# Altium PCB RF-UNIT.PcbDoc (part 2 of 4)
Units mm, origin at the board's own origin, x right, y up, seen from the top; angles counter-clockwise.
Board outline 187 x 77 mm, 2 copper layers (Top Layer, Top, Bottom Layer, Bottom); 271 components, 171 nets, 804 pads, 2169 vias.
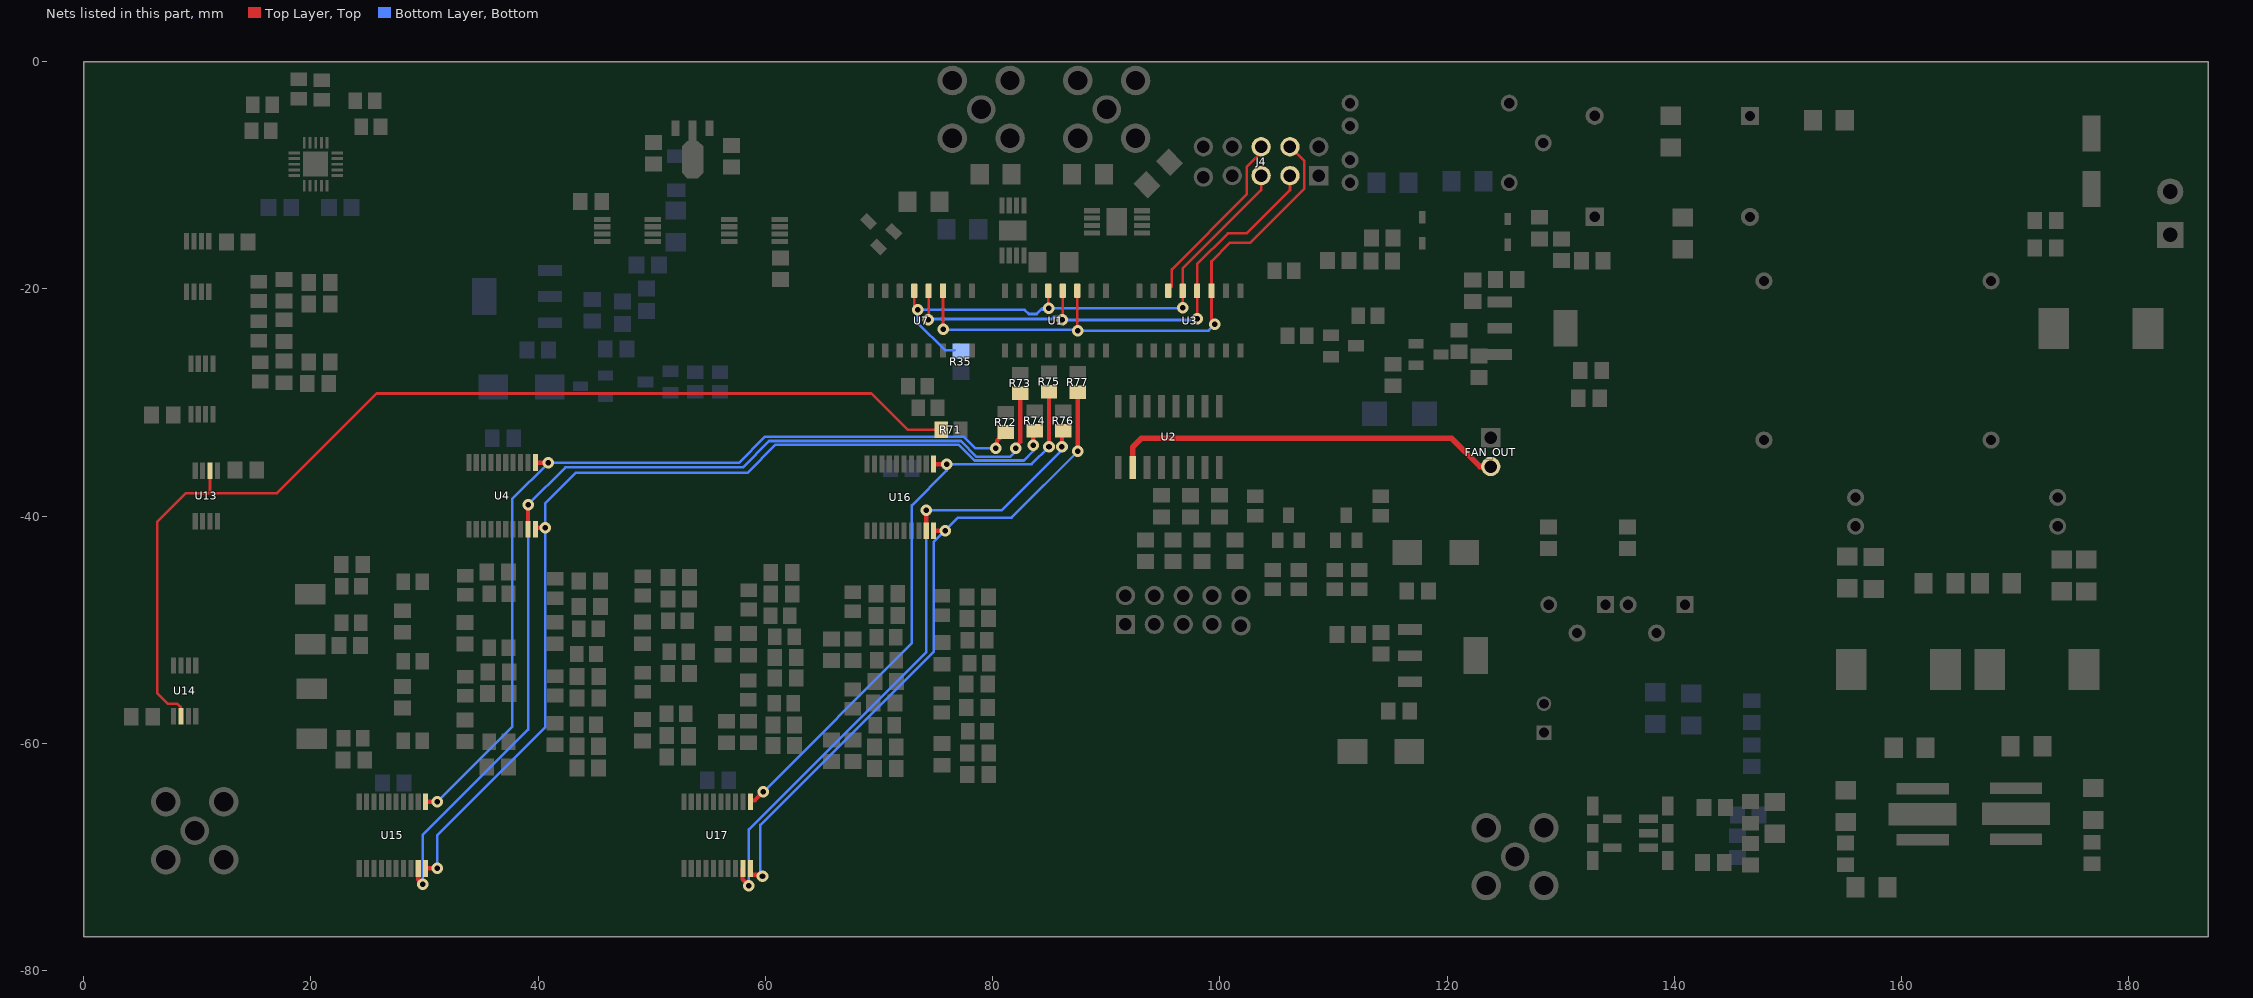
[diagram p2: the nets of this part, all layers, seen from the top]

## Via types
v1: diameter 0.5, hole 0.3, Top Layer, Top to Bottom Layer, Bottom, tented both sides, 1697 vias
v2: diameter 0.5, hole 0.3, Top Layer, Top to Bottom Layer, Bottom, 318 vias
v3: diameter 1.016, hole 0.486, Top Layer, Top to Bottom Layer, Bottom, tented both sides, 136 vias
v4: diameter 0.8, hole 0.486, Top Layer, Top to Bottom Layer, Bottom, tented both sides, 12 vias
v5: diameter 4, hole 3, Top Layer, Top to Bottom Layer, Bottom, 4 vias
v6: diameter 3.2, hole 3, Top Layer, Top to Bottom Layer, Bottom, 2 vias

## Nets (pads, with @x,y where several pads share a name; then routed paths per layer and width w, separated by ;. In a path a pad name is that pad's centre, name@x,y a point inside that pad or via, vN(x,y) a via of type N, cw(c..) or ccw(c..) an arc to the next point about the centre after c; other vN are vias at no path point) (continued)
BPF_1_A0: R74.1 U4.20 U15.20 | length 85.9
  Top Layer, Top w0.381: U15.20@30.103,-71.01 30.12,-70.993 v3(31.115,-70.993) ; U4.20@39.755,-41.165 39.755,-41.056 39.79,-41.021 v3(40.64,-41.021) ; v3(83.566,-33.782) 83.566,-32.6 R74.1@83.693,-32.473
  Bottom Layer, Bottom w0.23: v3(31.115,-70.993) 31.115,-68.102 40.64,-58.577 v3(40.64,-41.021) 40.64,-38.862 43.307,-36.195 58.42,-36.195 60.903,-33.712 77.019,-33.712 78.412,-35.105 82.751,-35.105 83.566,-34.29 v3(83.566,-33.782)
BPF_1_A1: R73.1 U4.19 U15.19 | length 92.3
  Top Layer, Top w0.381: U15.19@29.453,-71.01 29.459,-71.016 29.459,-72.004 v3(29.845,-72.39) ; U4.19@39.116,-41.154 v3(39.116,-38.989) ; v3(82.042,-34.036) 82.042,-33.864 82.423,-33.483 R73.1@82.423,-29.171
  Bottom Layer, Bottom w0.23: v3(29.845,-72.39) 29.845,-68.072 39.116,-58.801 v3(39.116,-38.989) 42.405,-35.7 58.026,-35.7 60.333,-33.393 77.208,-33.393 78.601,-34.786 81.546,-34.786 82.042,-34.29 v3(82.042,-34.036)
BPF_1_EN: R72.1 U4.1 U15.1 | length 78.7
  Top Layer, Top w0.381: U15.1@30.103,-65.134 30.12,-65.151 v3(31.115,-65.151) ; U4.1@39.755,-35.289 39.772,-35.306 v3(40.894,-35.306) ; v3(80.264,-34.036) 80.386,-33.914 80.386,-33.367 80.619,-33.135 80.619,-33.01 81.028,-32.6 R72.1@81.153,-32.6
  Bottom Layer, Bottom w0.23: v3(31.115,-65.151) 37.719,-58.547 37.719,-38.481 v3(40.894,-35.306) 57.658,-35.306 59.944,-33.02 77.47,-33.02 78.486,-34.036 v3(80.264,-34.036)
BPF_2_A0: R77.1 U16.20 U17.20 | length 59.7
  Top Layer, Top w0.381: U17.20@58.678,-71.01 58.678,-71.523 58.713,-71.557 59.433,-71.557 59.576,-71.7 v3(59.748,-71.7) ; U16.20@74.807,-41.292 74.824,-41.275 v3(75.819,-41.275) ; v3(87.503,-34.29) R77.1@87.503,-29.083
  Bottom Layer, Bottom w0.23: v3(59.748,-71.7) 59.563,-71.515 59.563,-67.183 74.803,-51.943 74.803,-42.291 v3(75.819,-41.275) 76.962,-40.132 81.661,-40.132 v3(87.503,-34.29)
BPF_2_A1: R76.1 U16.19 U17.19 | length 58.9
  Top Layer, Top w0.381: U17.19@58.028,-71.01 57.993,-71.045 57.993,-71.963 v3(58.547,-72.517) ; U16.19@74.157,-41.292 74.163,-41.286 74.163,-39.502 v3(74.168,-39.497) ; v3(86.106,-33.909) 86.106,-32.6 R76.1@86.233,-32.473
  Bottom Layer, Bottom w0.23: v3(58.547,-72.517) 58.547,-67.564 74.168,-51.943 v3(74.168,-39.497) 80.772,-39.497 86.106,-34.163 v3(86.106,-33.909)
BPF_2_EN: R75.1 U16.1 U17.1 | length 52.7
  Top Layer, Top w0.381: U17.1@58.678,-65.134 58.678,-65.06 58.713,-65.025 59.054,-65.025 v3(59.817,-64.262) ; U16.1@74.807,-35.416 74.824,-35.433 v3(75.946,-35.433) ; v3(84.963,-33.909) R75.1@84.963,-29.044
  Bottom Layer, Bottom w0.23: v3(59.817,-64.262) 72.898,-51.181 72.898,-39.053 75.946,-36.005 v3(75.946,-35.433) 83.439,-35.433 v3(84.963,-33.909)
BPF_ON: R71.1 U13.2 U14.2 | length 95.4
  Top Layer, Top w0.23: U14.2@8.565,-57.597 8.53,-57.562 8.53,-56.79 8.255,-56.515 7.408,-56.515 6.477,-55.584 6.477,-40.513 9.017,-37.973 11.176,-37.973 ; U13.2@11.12,-36.002 11.12,-37.917 11.176,-37.973 ; R71.1@75.477,-32.385 72.517,-32.385 69.342,-29.21 25.781,-29.21 17.018,-37.973 11.176,-37.973
CTRL_CLK: J4.4 U1.11 U3.11 U7.11 | length 52
  Top Layer, Top w0.23: U7.11@75.638,-20.093 U7.11@75.638,-20.168 75.638,-23.531 v3(75.666,-23.559) ; U1.11@87.443,-20.093 U1.11@87.443,-20.168 87.443,-23.644 v3(87.482,-23.683) ; v3(99.568,-23.114) 99.267,-22.813 U3.11@99.267,-20.168 99.267,-17.573 100.901,-15.938 102.679,-15.938 107.442,-11.176 107.442,-8.763 J4.4@106.172,-7.493
  Bottom Layer, Bottom w0.23: v3(75.666,-23.559) 75.696,-23.59 87.328,-23.59 87.359,-23.559 v3(87.482,-23.683) 98.999,-23.683 v3(99.568,-23.114)
CTRL_DATA: J4.6 U3.14 | length 16
  Top Layer, Top w0.23: U3.14@95.457,-20.093 95.77,-19.78 95.77,-18.275 102.362,-11.684 102.362,-9.271 103.351,-8.282 103.351,-7.774 J4.6@103.632,-7.493
CTRL_OE: J4.5 R35.2 U1.13 U3.13 U7.13 | length 47.7
  Top Layer, Top w0.23: U7.13@73.098,-20.168 73.098,-21.536 v3(73.406,-21.844) ; U1.13@84.903,-20.093 U1.13@84.903,-20.168 84.903,-21.664 v3(84.944,-21.705) ; v3(96.716,-21.678) 96.727,-21.667 U3.13@96.727,-20.168 96.727,-18.208 103.632,-11.303 J4.5@103.632,-10.033
  Bottom Layer, Bottom w0.23: R35.2@76.647,-25.4 75.819,-25.4 73.406,-22.987 v3(73.406,-21.844) 82.827,-21.844 83.196,-22.213 83.877,-22.213 84.276,-21.814 ; v3(96.716,-21.678) 96.689,-21.705 v3(84.944,-21.705) ; 84.276,-21.814 84.835,-21.814 v3(84.944,-21.705) ; 84.276,-21.814 84.385,-21.705 v3(84.944,-21.705)
CTRL_RCLK: J4.3 U1.12 U3.12 U7.12 | length 46.2
  Top Layer, Top w0.23: v3(74.317,-22.715) 74.368,-22.664 U7.12@74.368,-20.168 U7.12@74.368,-20.093 ; v3(86.139,-22.737) 86.173,-22.702 U1.12@86.173,-20.168 U1.12@86.173,-20.093 ; v3(97.999,-22.609) v3(97.999,-22.609) U3.12@97.997,-20.168 97.997,-17.827 100.711,-15.113 102.362,-15.113 106.172,-11.303 J4.3@106.172,-10.033
  Bottom Layer, Bottom w0.23: v3(74.317,-22.715) 74.386,-22.646 85.21,-22.646 85.377,-22.479 85.88,-22.479 v3(86.139,-22.737) 97.871,-22.737 v3(97.999,-22.609)
FAN_OUT: FAN_OUT.2 U2.10 | length 34.7
  Top Layer, Top w0.5: U2.10@92.329,-35.72 92.329,-33.909 93.091,-33.147 120.396,-33.147 122.884,-35.635 FAN_OUT.2@123.843,-35.635